# Altium PCB MCU_LORA.PcbDoc
Units mm, origin at the board's own origin, x right, y up, seen from the top; angles counter-clockwise.
Board outline 22 x 22 mm, 2 copper layers (Top Layer, Bottom Layer), stack 0.871 mm thick; 19 components, 30 nets, 124 pads, 75 vias.
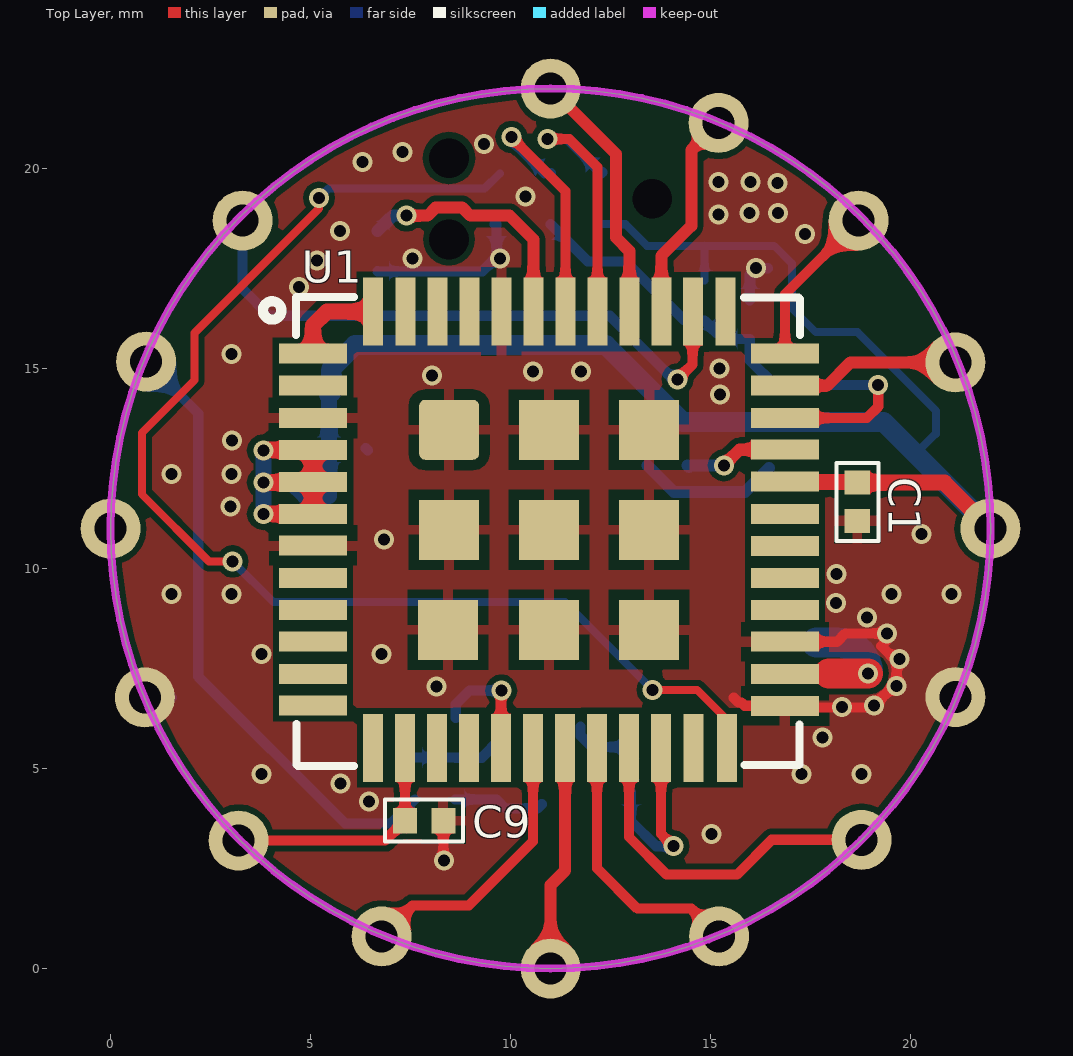
[diagram p0: Top Layer view]
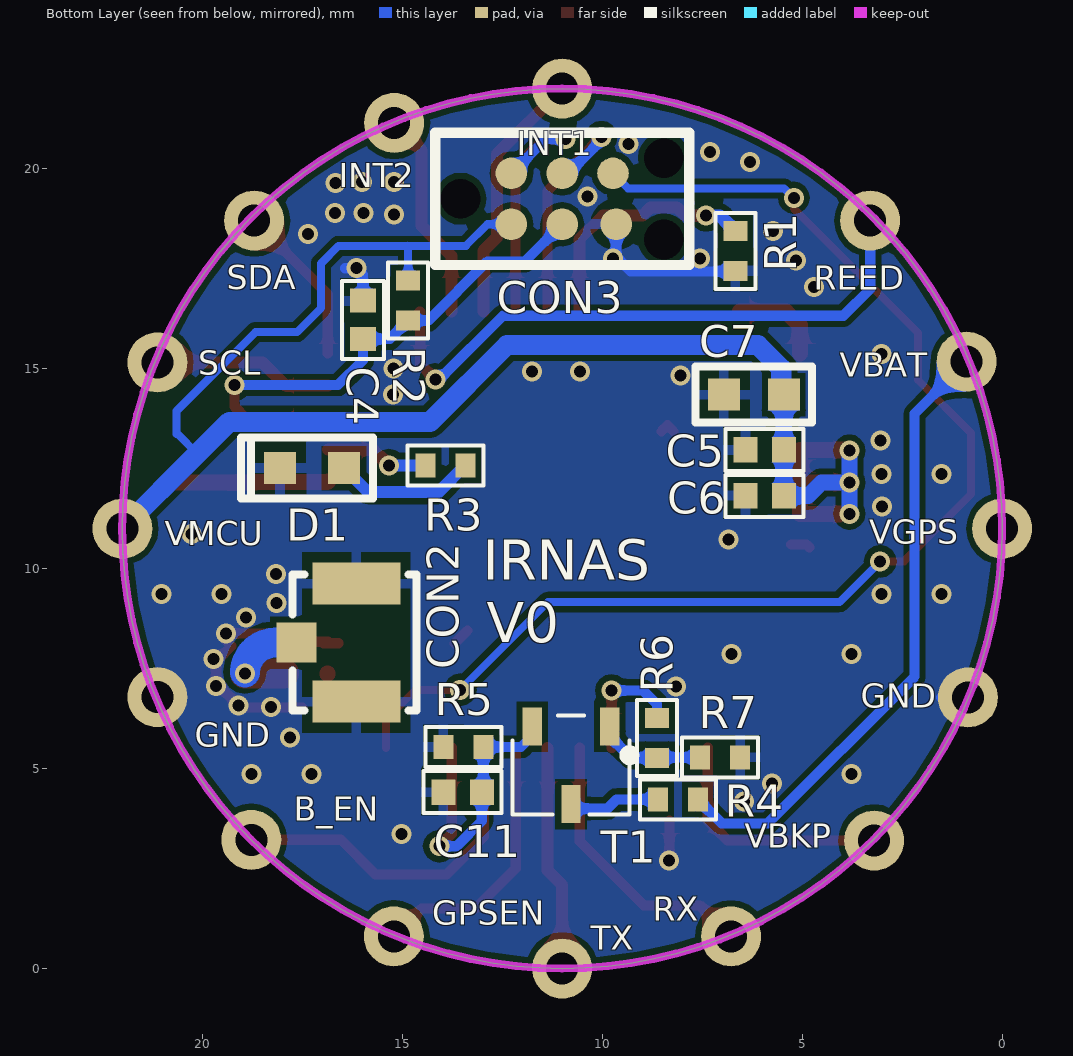
[diagram p1: Bottom Layer view, seen from below]
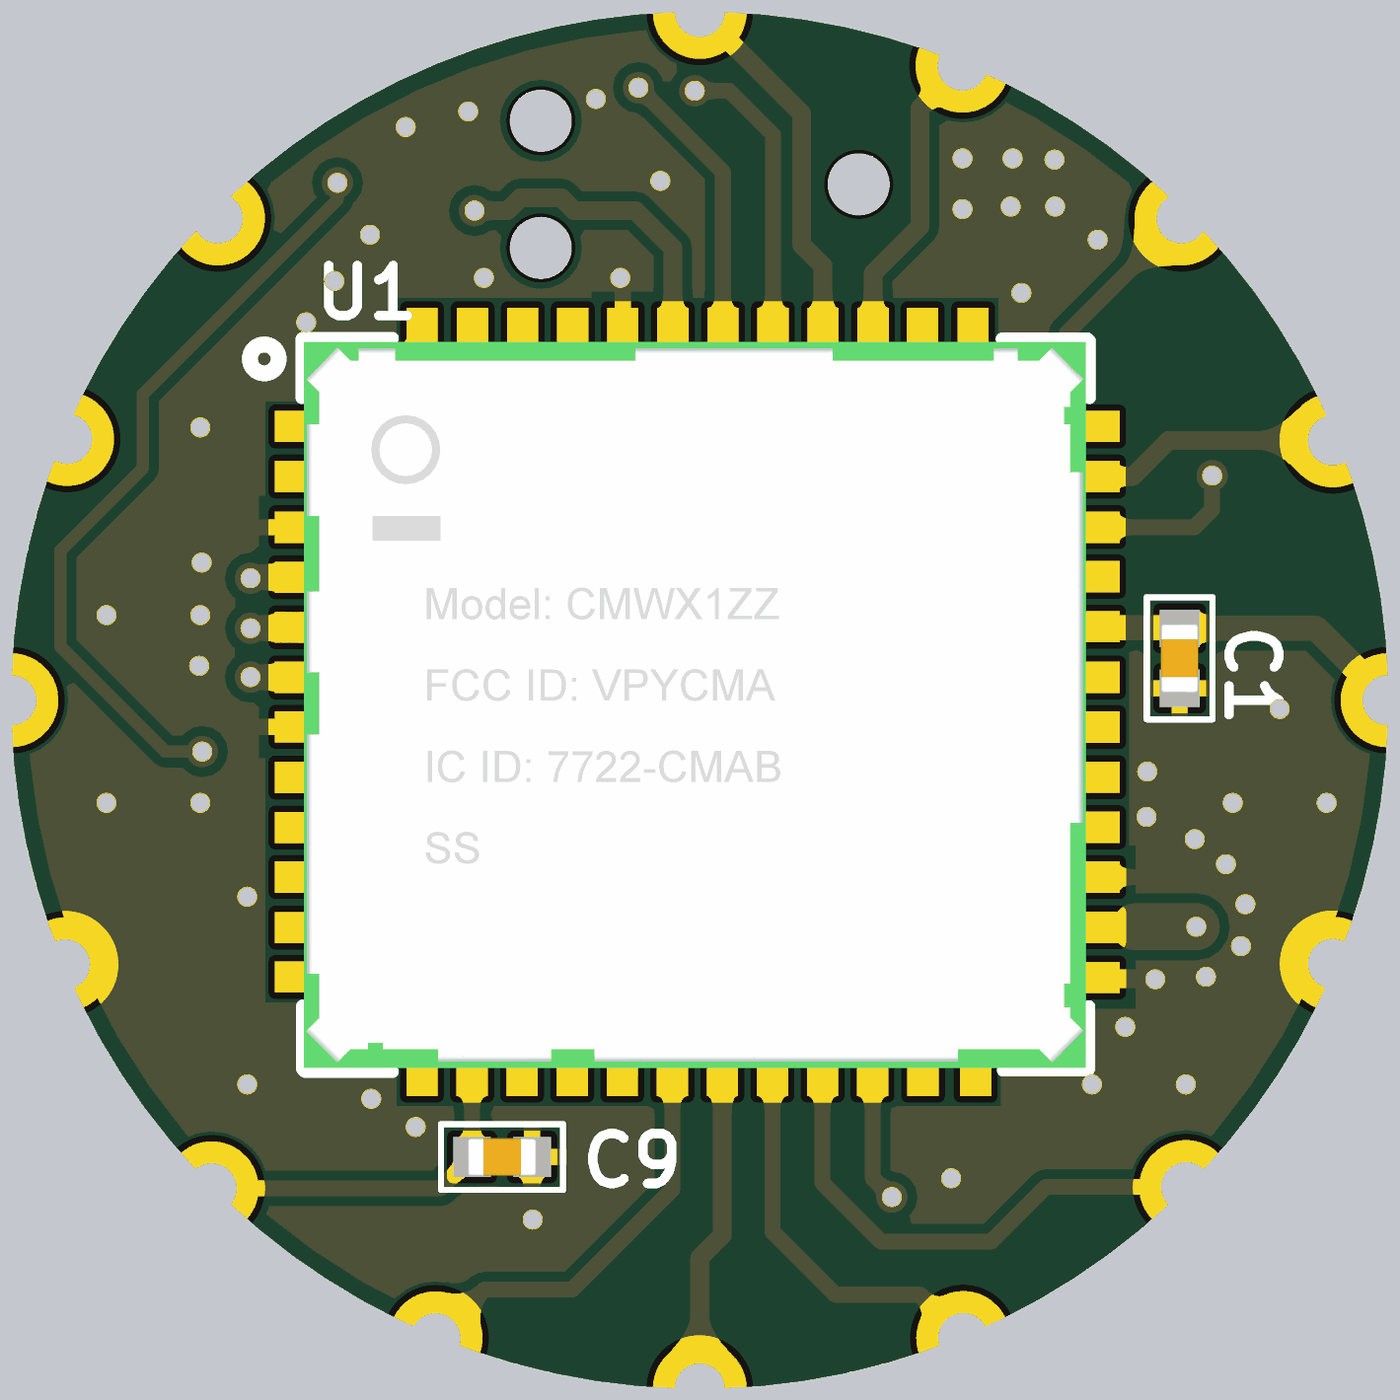
[diagram p2: 3D render of the assembled board from above, using the file's embedded part models]
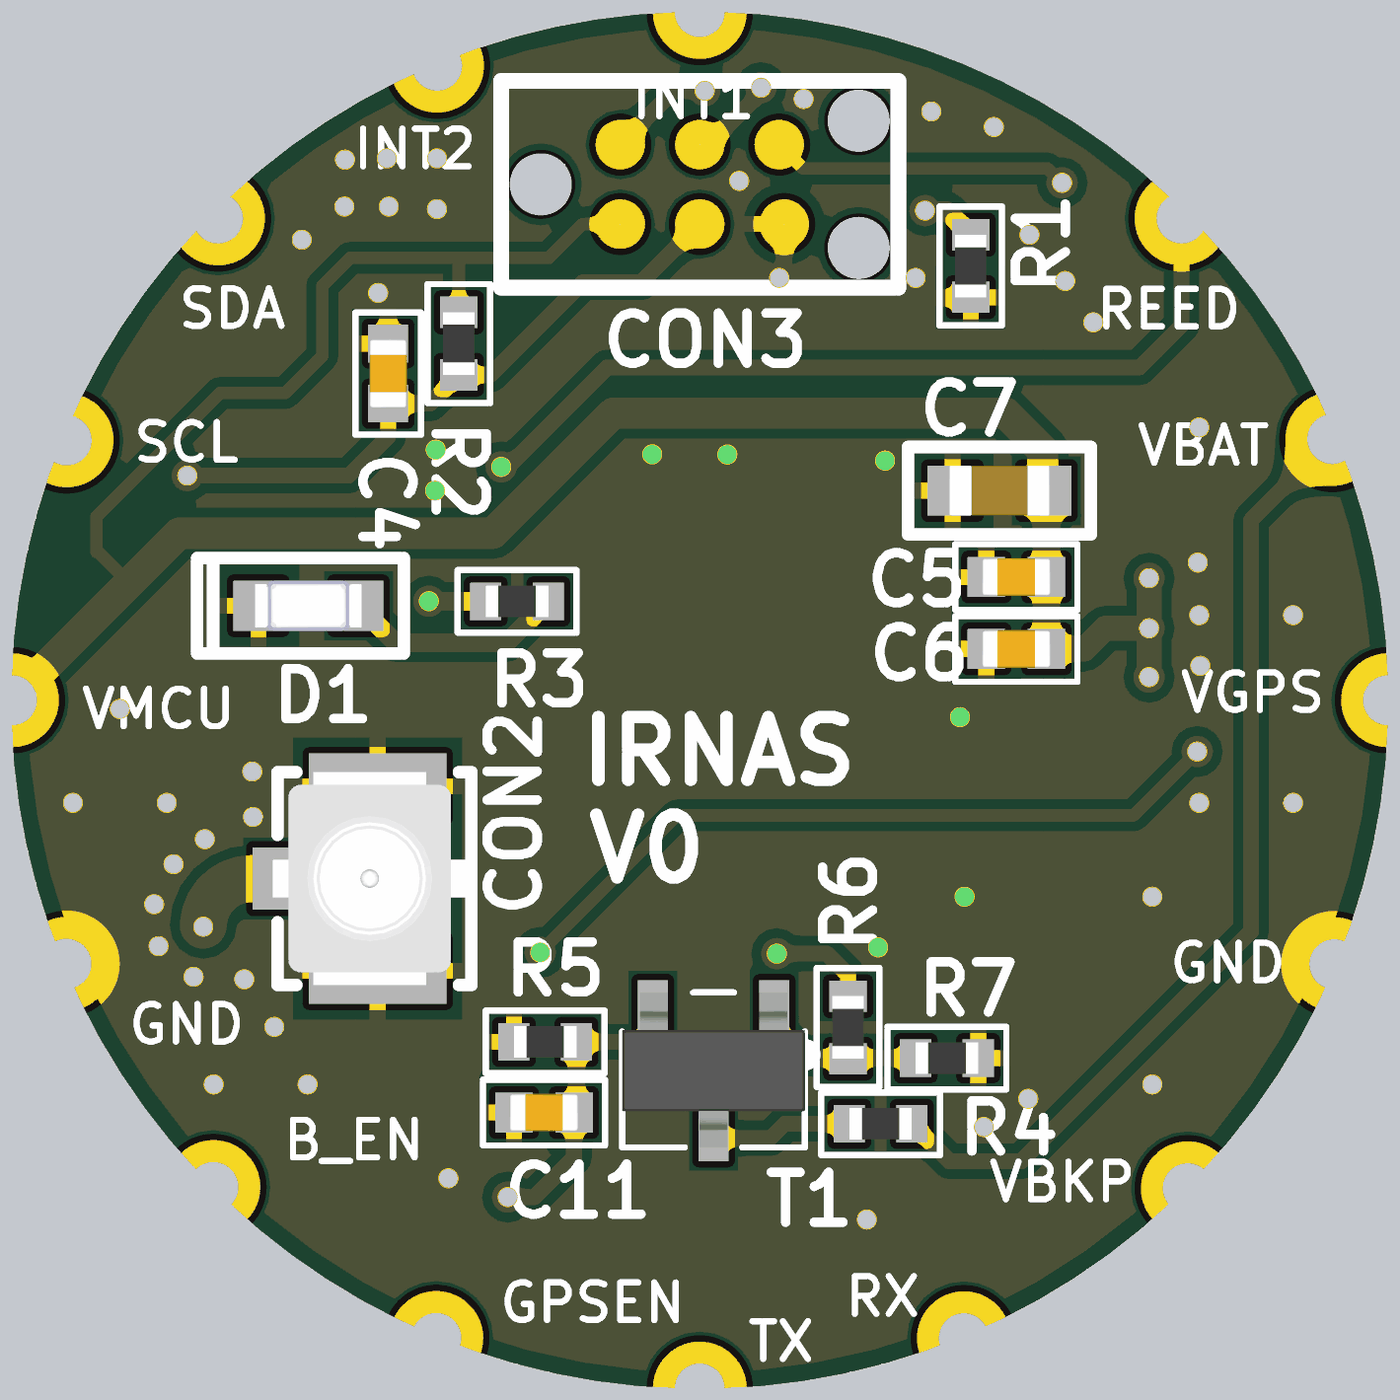
[diagram p3: 3D render of the assembled board from below, using the file's embedded part models]

## Layer stack, top to bottom
Top Solder: solder mask 0.0102, Solder Resist, Dk 3.5
Top Layer: signal copper 0.0356
Dielectric 1: dielectric 0.8, FR-4, Dk 4.8
Bottom Layer: signal copper 0.0356
Bottom Solder: solder mask 0.0102, Solder Resist, Dk 3.5

## Board outline
11,0 cw(c11,11) 0,11 cw(c11,11) 11,22 cw(c11,11) 22,11 cw(c11,11)

## Design rules (kind name [scope] priority, off if disabled: settings)
Clearance Clearance_CON [InComponent('CON1')] p1: gap=-100 ignorepadtopadclearanceinfootprint=TRUE
Clearance [All] p2: gap=0.152 ignorepadtopadclearanceinfootprint=FALSE
ComponentClearance ComponentClearance_CON [InComponent('CON1')] p1: gap=-100 collisioncheckmode=3 verticalgap=-100 showdistances=FALSE
ComponentClearance [All] p2: gap=0.254 collisioncheckmode=3 verticalgap=0.254 showdistances=FALSE
PolygonConnect [All] p1: thpad.connectstyle=Direct thpad.reliefconductorwidth=0.254 thpad.reliefentries=4 thpad.polygonreliefangle="90 Angle" thpad.airgapwidth=0.254 smdpad.connectstyle=Relief smdpad.reliefconductorwidth=0.254 smdpad.reliefentries=4 smdpad.polygonreliefangle="90 Angle" smdpad.airgapwidth=0.254 via.connectstyle=Direct via.reliefconductorwidth=0.254 via.reliefentries=4 via.polygonreliefangle="90 Angle" via.airgapwidth=0.254
RoutingVias [All] p1: holewidth=0.3 width=0.5 viastyle="Through Hole" minholewidth=0.2 minwidth=0.4 maxholewidth=1.5 maxwidth=2
SolderMaskExpansion [All] p1: expansion=0.102
Width [All] p1: maxlimit=5 minlimit=0.15 preferedwidth=0.2
29 further rules are at their usual default settings.

## Classes and differential pairs
component class MAIN_MCU_LORA: C11 CON2 CON3 D1 R3 R4 R5 R6 R7 T1
component class MCU: C1 C4 C5 C6 C7 C9 R1 R2 U1

## Components (designator, comment, footprint, x,y, rotation, side; value= is the part's Value field where it differs from the comment)
C1 "1uF" CAP0402 18.67,11.67 r90 top
C4 "100nF" CAP0402 15.98,16.22 r270 bottom
C5 "1uF" CAP0402 5.94,12.97 r180 bottom
C6 "100nF" CAP0402 5.94,11.82 r180 bottom
C7 "10uF" CAP0603 6.21,14.35 r180 bottom
C9 "10nF" CAP0402 7.84,3.7 r180 top
C11 "10nF" CAP0402 13.49,4.41 r180 bottom
CON2 "U.FL-R-SMT-1(10)" "ufl connector smd" 16.4,8 r90 bottom
CON3 "Tag connect" TC2030-IDC-NL 13.54,19.245 r180 bottom
D1 "LED RED" LED0603 17.255,12.51 r180 bottom
R1 "10K" RES0402 6.67,17.94 r270 bottom
R2 "10k" RES0402 14.85,16.7 r90 bottom
R3 "100R" RES0402 13.92,12.58 r180 bottom
R4 "71k5" RES0402 8.11,4.23 r180 bottom
R5 "100k" RES0402 13.47,5.54 r180 bottom
R6 "100R" RES0402 8.63,5.77 r270 bottom
R7 "100k" RES0402 7.05,5.28 r0 bottom
T1 "2N7002ET1G" SOT23-3AL 10.78,5.08 r270 bottom value=BSS123
U1 "CMWX1ZZABZ" "Lora Module ES0" 11.3,11 r0 top

## Footprints (in the part's own frame and the unit in brackets; to place one, negate y for a bottom-side part, rotate by r counter-clockwise, add the part's x,y. Pads: shape width x height; smd on the part's side, far side on the other; paste and mask are expansions set on the pad)
CAP0402 [mm] "Chip Capacitor, 2-Leads, Body 1.00x0.50mm, IPC Medium Density"
  rect 0.6x0.64 smd: 1(-0.48,0) 2(0.48,0)
  silkscreen extent -0.97,-0.53 0.97,0.53, body extent -0.55,-0.3 0.55,0.3, height 0.45
CAP0603 [mm]
  rect 0.8x0.8 smd: 1(-0.75,0) 2(0.75,0)
  silkscreen extent -1.46,-0.7 1.46,0.7, body extent -0.8,-0.4 0.8,0.4, height 0.9
LED0603 [mm]
  rect 0.8x0.8 smd: 1(-0.8,0) 2(0.8,0)
  silkscreen extent -1.78,-0.76 1.52,0.76, body extent -0.85,-0.4 0.85,0.4, height 0.66
"Lora Module ES0" [mm]
  rect 1.7x0.5 smd paste-5: 1(-6.24,4.375) 2(-6.24,3.575) 3(-6.24,2.765) 4(-6.24,1.965) 5(-6.24,1.165) 6(-6.24,0.365) 7(-6.24,-0.425) 8(-6.24,-1.235) 9(-6.24,-2.035) 10(-6.24,-2.825) 11(-6.24,-3.635) 12(-6.24,-4.425) 25(5.562,-4.43) 26(5.562,-3.629) 27(5.562,-2.827) 28(5.562,-2.03) 29(5.562,-1.23) 30(5.562,-0.43) 31(5.56,0.365) 32(5.56,1.175) 33(5.56,1.975) 34(5.56,2.765) 35(5.56,3.575) 36(5.56,4.375)
  rect 0.5x1.7 smd paste-5: 13(-4.74,-5.48) 14(-3.938,-5.48) 15(-3.138,-5.48) 16(-2.338,-5.48) 17(-1.538,-5.48) 18(-0.738,-5.48) 19(0.062,-5.48) 20(0.862,-5.479) 21(1.662,-5.479) 22(2.462,-5.48) 23(3.269,-5.48) 24(4.11,-5.48) 37(4.07,5.425) 38(3.26,5.425) 39(2.47,5.425) 40(1.67,5.425) 41(0.87,5.425) 42(0.07,5.425) 43(-0.73,5.425) 44(-1.53,5.425) 45(-2.33,5.425) 46(-3.13,5.425) 47(-3.93,5.425) 48(-4.74,5.425)
  rrect20% 1.5x1.5 smd: 49(-2.838,2.47)
  rect 1.5x1.5 smd: 50(-0.338,2.47) 51(2.162,2.47) 52(-2.838,-0.03) 53(-0.338,-0.03) 54(2.162,-0.03) 55(-2.863,-2.53) 56(-0.338,-2.53) 57(2.162,-2.53)
  silkscreen extent -7.49,-5.94 5.93,5.78, body extent -6.63,-5.88 5.87,5.72, height 1.76
RES0402 [mm] "Chip Resistor, 2-Leads, Body 1.00x0.50mm, IPC Medium Density"
  rect 0.5x0.6 smd: 1(-0.5,0) 2(0.5,0)
  silkscreen extent -0.95,-0.5 0.95,0.5, body extent -0.5,-0.25 0.5,0.25, height 0.35
SOT23-3AL [mm]
  rect 0.95x0.48 smd: 1(-0.97,0.97) 2(-0.97,-0.97) 3(0.97,0)
  silkscreen extent -1.25,-1.46 1.23,1.58, body extent -1.25,-1.46 1.23,1.46, height 0.95
TC2030-IDC-NL [mm] "Tag-Connect 6-Pin with No Legs (PN# TC2030-IDC-NL)"
  round 0.9 hole 0.995 unplated: 0(0,0) 0(5.08,-1.016) 0(5.08,1.016)
  round 0.79 smd paste-0.39: 1(1.27,-0.635) 2(1.27,0.635) 3(2.54,-0.635) 4(2.54,0.635) 5(3.89,-0.635) 6(3.81,0.635)
  silkscreen extent -0.64,-1.65 5.71,1.65
"ufl connector smd" [mm]
  rect 1x1 smd: 1(0.15,1.248)
  rect 1.05x2.2 smd: 2(-1.325,-0.252) 2(1.625,-0.252)
  silkscreen extent -1.55,-1.75 1.85,1.35, body extent -1.55,-1.67 1.85,1.43, height 1.25

## Part data
C1 C5: library part "C - 1uF/0402", "CAP CER 1UF 10V 20% X5R 0402", Case/Package=0402, Case Code (Metric)=1005, Dielectric=X5R, IRNAS Part No.=/, Manufacturer=Murata, Manufacturer Part Number=GRM155R61A105ME15D, Max Operating Temperature=85°C, Min Operating Temperature=-55°C, Package Quantity=1, Supplier Part Number 1=2426953, Tolerance=20%, Voltage=10V, Capacitance=1uF, Case Code (Imperial)=0402, ComponentLink1Description=https://datasheet.ciiva.com/164/product-164665.pdf, ComponentLink1URL=https://datasheet.ciiva.com/164/product-164665.pdf, ComponentLink2Description=https://datasheet.ciiva.com/11616/product-11616508.pdf, ComponentLink2URL=https://datasheet.ciiva.com/11616/product-11616508.pdf, ComponentLink3Description=https://datasheet.ciiva.com/46418/1769893-46418047.pdf, ComponentLink3URL=https://datasheet.ciiva.com/46418/1769893-46418047.pdf, ComponentLink4Description=https://datasheet.ciiva.com/164/partnumbering-e-01-164666.pdf, ComponentLink4URL=https://datasheet.ciiva.com/164/partnumbering-e-01-164666.pdf, ComponentLink5Description=https://datasheet.ciiva.com/164/partnumbering-e-01-164667.pdf, ComponentLink5URL=https://datasheet.ciiva.com/164/partnumbering-e-01-164667.pdf, Depth=0.5mm, Height=0.5mm, Lead Free="Lead Free", Length=1mm, Mount="Surface Mount", Packaging="Tape and Reel", Pricing 1="10=0.0379, 100=0.0266, 500=0.0156, 2500=0.0098, 5000=0.0083 (EUR)", Radiation Hardening=No, REACH SVHC="No SVHC", Stock 1=0, Supplier 1=Farnell, Thickness=0.022inch, Voltage Rating=10V, Voltage Rating (DC)=10V, Width=0.02inch
C4 C6: library part "C - 100nF/0402", "MULTICOMP         MC0402X104J160CT             SMD Multilayer Ceramic Capacitor, 0402 [1005 Metric], 0.1 F, 16 V,  5%, X5R, MC Series                          New", Case Code (Imperial)=0402, Case Code (Metric)=1005, Dielectric=X5R, IRNAS Part No.=/, Manufacturer=Multicomp, Manufacturer Part Number=MC0402X104J160CT, Max Operating Temperature=85°C, Min Operating Temperature=-55°C, Supplier Part Number 1=2627419, Tolerance=5%, Voltage Rating=16V, Capacitance=100nF, ComponentLink1Description=http://www.farnell.com/datasheets/2117933.pdf, ComponentLink1URL=http://www.farnell.com/datasheets/2117933.pdf, ComponentLink2Description=http://www.farnell.com/datasheets/2117900.pdf, ComponentLink2URL=http://www.farnell.com/datasheets/2117900.pdf, Packaging="Tape and Reel", Pricing 1="10=0.0139, 100=0.0108, 500=0.0076, 2500=0.0051, 5000=0.0038 (EUR)", REACH SVHC="No SVHC", Stock 1=3230, Supplier 1=Farnell, Voltage Rating (DC)=16V
C7: "10uf/0603/20%", Manufacturer=KEMET, Manufacturer Part Number=C0603C106M8PACTU, Supplier Part Number 1=2820985, Pricing 1="10=0.555, 100=0.315, 500=0.238, 1000=0.2, 2000=0.174, 4000=0.143, 20000=0.123 (GBP)", Stock 1=0, Supplier 1=Farnell
C9 C11: library part "C - 10nF/0402", "CAP CER 10000PF 16V X7R 0402", Case/Package=0402, Case Code (Metric)=1005, Dielectric=X7R, IRNAS Part No.=/, Manufacturer=Murata, Manufacturer Part Number=GRM155R71C103KA01D, Max Operating Temperature=125°C, Min Operating Temperature=-55°C, Package Quantity=1, Supplier Part Number 1=1828864, Tolerance=10%, Voltage=16V, Capacitance=10nF, Case Code (Imperial)=0402, ComponentLink1Description=https://datasheet.ciiva.com/129/partnumbering-e-01-129774.pdf, ComponentLink1URL=https://datasheet.ciiva.com/129/partnumbering-e-01-129774.pdf, ComponentLink2Description=https://datasheet.ciiva.com/129/partnumbering-e-01-129775.pdf, ComponentLink2URL=https://datasheet.ciiva.com/129/partnumbering-e-01-129775.pdf, ComponentLink3Description=https://datasheet.ciiva.com/129/product-129776.pdf, ComponentLink3URL=https://datasheet.ciiva.com/129/product-129776.pdf, ComponentLink4Description=https://datasheet.ciiva.com/18184/getdatasheetpartid-178863-18184649.pdf, ComponentLink4URL=https://datasheet.ciiva.com/18184/getdatasheetpartid-178863-18184649.pdf, ComponentLink5Description=https://datasheet.ciiva.com/22698/608985-22698415.pdf, ComponentLink5URL=https://datasheet.ciiva.com/22698/608985-22698415.pdf, ComponentLink6Description=https://datasheet.ciiva.com/7937/608985-7937614.pdf, ComponentLink6URL=https://datasheet.ciiva.com/7937/608985-7937614.pdf, Depth=0.5mm, Height=0.5mm, Lead Free="Lead Free", Length=1mm, Mount="Surface Mount", Number of Pins=2, Packaging="Tape and Reel", Pricing 1="10=0.0216, 100=0.0151, 500=0.0104, 2500=0.0069, 5000=0.0056 (EUR)", Radiation Hardening=No, REACH SVHC="No SVHC", Stock 1=16478, Supplier 1=Farnell, Termination=SMD/SMT, Thickness=0.022inch, Voltage Rating=16V, Voltage Rating (DC)=16V, Width=0.02inch
CON2: "RF / Coaxial Connector, U.FL Coaxial, Straight Jack, Surface Mount Vertical, 50 ohm, Brass", Dielectric Material="Liquid Crystal Polymer (LCP)", Frequency - Max=6GHz, Housing Color=Beige, Manufacturer=Hirose, Operating Temperature="-40°C ~ 90°C", Standard Package=2,500, Supplier Part Number 1=1688077, Voltage Rating=-, Body Finish=Silver, Body Material="Phosphor Bronze", Cable Group=-, Category="Connectors, Interconnects", Center Contact Material=Brass, Center Contact Plating=Gold, ComponentLink1Description=http://www.farnell.com/datasheets/91524.pdf, ComponentLink1URL=http://www.farnell.com/datasheets/91524.pdf, ComponentLink2Description=http://uk.rs-online.com/webdocs/1363/0900766b81363563.pdf, ComponentLink2URL=http://uk.rs-online.com/webdocs/1363/0900766b81363563.pdf, ComponentLink3Description=http://www.farnell.com/datasheets/1947917.pdf, ComponentLink3URL=http://www.farnell.com/datasheets/1947917.pdf, Connector Style="U.FL, Ultra Miniature Coaxial", Connector Type="Receptacle, Male Pin", Contact Termination=Solder, Family="Coaxial Connectors (RF)", Fastening Type=Snap-On, Featured Product="U.FL Series Connectors", Features=-, Impedance="50 Ohm", Ingress Protection=-, Manufacturer Part Number=U.FL-R-SMT-1(10), Mounting Type="Surface Mount", Online Catalog="UMCC (Ultra Miniature Coax Connectors), U.FL Series", Other Names="H11891TR  Q5400621  U.FL-R-SMT-1 10  U.FL-R-SMT-1(10)-ND  UFLRSMT110", Packaging="Tape & Reel (TR)", Series=U.FL, Shield Termination=Solder, Stock 1=0, Supplier 1=Farnell
CON3: library part "tag connecot 6 pin"
D1: library part "LED - LED RED", "BROADCOM LIMITED - HSMS-C190 - LED, RED, 10MCD, 626NM", Forward Current If=20, Forward Voltage=2.1, LED Colour=Red, Manufacturer="BROADCOM LIMITED", Manufacturer Part Number=HSMS-C190, Supplier Part Number 1=2497356, Automotive Qualification Standard=-, Bulb Size=-, ComponentLink1Description=http://www.farnell.com/datasheets/313031.pdf, ComponentLink1URL=http://www.farnell.com/datasheets/313031.pdf, ComponentLink2Description=http://www.farnell.com/datasheets/1681524.pdf, ComponentLink2URL=http://www.farnell.com/datasheets/1681524.pdf, ComponentLink3Description=http://www.farnell.com/datasheets/2165483.pdf, ComponentLink3URL=http://www.farnell.com/datasheets/2165483.pdf, LED Mounting=SMD, Lens Shape=Rectangular, Luminous Intensity=10, MSL=-, Packaging="Cut Tape", Pricing 1="1=0.361, 10=0.256, 50=0.235, 100=0.106, 200=0.101 (GBP)", Product Range=-, RoHS=YES, Stock 1=7534, Supplier 1=Farnell, SVHC="No SVHC (17-Dec-2015)<!--FANDB--><div class=\"features-and-benefits-container\"><div class=\"features-and-benefits-description\"><span class=\"features-benefits-value\">The HSMS-C190 is a HER SMD Chip LED with untinted/diffused lens, made of GaP. It is designed in an industry standard package 1.6 x 0.8mm footprint with 0.8mm profile. It is compatible with IR reflow solder processes. The small size and wide viewing angle make this LED prime choices for backlighting applications and front panel illumination especially where space is a premium.</span></div><div class=\"features-and-benefits-list\"><ul class=\"features-and-benefits-list-list\"><li class=\"features-and-benefits-list-item\">Small size</li><li class=\"features-and-benefits-list-item\">Industry standard footprint</li><li class=\"features-and-benefits-list-item\">Compatible with IR solder</li><li class=\"features-and-benefits-list-item\">Diffused optics</li><li class=\"features-and-benefits-list-item\">-40 to 85", Viewing Angle=170°, Wavelength Typ=626
R1 R2: library part "R - 10k/0402", "MULTICOMP         MCWR04X1002FTL             SMD Chip Resistor, Thick Film, 10 kohm, 50 V, 0402 [1005 Metric], 62.5 mW,  1%, MCWR Series", Case/Package=0402, Case Code (Metric)=1005, IRNAS Part No.=I-100014, Manufacturer=Multicomp, Manufacturer Part Number=MCWR04X1002FTL, Power Rating=62.5mW, Resistance=10kR, Supplier Part Number 1=2447096, Temperature Coefficient=100ppm/°C, Tolerance=1%, Voltage Rating=50V, Case Code (Imperial)=0402, ComponentLink1Description=http://www.farnell.com/datasheets/1849611.pdf, ComponentLink1URL=http://www.farnell.com/datasheets/1849611.pdf, Composition="Thick Film", Packaging="Cut Tape", Pricing 1="10=0.0029, 100=0.0017, 500=0.0012, 2500=0.001, 5000=0.0008 (EUR)", REACH SVHC="No SVHC", Stock 1=602609, Supplier 1=Farnell, Voltage Rating (DC)=50V
R3 R6: library part "R - 100R/0402", "MULTICOMP         MCMR04X1000FTL            SMD Chip Resistor, Ceramic, MCMR Series, 100 ohm, 50 V, 0402 [1005 Metric], 62.5 mW,  1%", Case/Package=0402, Case Code (Metric)=1005, IRNAS Part No.=/, Manufacturer=Multicomp, Manufacturer Part Number=MCMR04X1000FTL, Power Rating=62.5mW, Supplier Part Number 1=2072515, Temperature Coefficient=100ppm/°C, Tolerance=1%, Voltage Rating=50V, Case Code (Imperial)=0402, ComponentLink1Description=https://datasheet.ciiva.com/28692/1716705-28692087.pdf, ComponentLink1URL=https://datasheet.ciiva.com/28692/1716705-28692087.pdf, ComponentLink2Description=https://datasheet.ciiva.com/22708/1716705-22708156.pdf, ComponentLink2URL=https://datasheet.ciiva.com/22708/1716705-22708156.pdf, Composition=Ceramic, Packaging="Cut Tape", Pricing 1="10=0.0071, 100=0.0042, 500=0.003, 2500=0.0024, 5000=0.0019 (GBP)", REACH SVHC="No SVHC", Resistance=100R, Stock 1=62365, Supplier 1=Farnell, Voltage Rating (DC)=50V
R4: library part "R - 71k5/0402", "MULTICOMP         MCMR04X7152FTL            Surface Mount Chip Resistor, Ceramic, MCMR Series, 71.5 kohm, 62.5 mW,  1%, 50 V", Case/Package=0402, Case Code (Metric)=1005, IRNAS Part No.=/, Manufacturer=Multicomp, Manufacturer Part Number=MCMR04X7152FTL, Power Rating=62.5mW, Resistance=71.5kR, Supplier Part Number 1=2073227, Temperature Coefficient=100ppm/°C, Tolerance=1%, Voltage Rating=50V, Case Code (Imperial)=0402, ComponentLink1Description=https://datasheet.ciiva.com/28672/1716706-28672249.pdf, ComponentLink1URL=https://datasheet.ciiva.com/28672/1716706-28672249.pdf, Composition=Ceramic, Packaging="Cut Tape", Pricing 1="10=0.0054, 100=0.0048, 500=0.0041, 2500=0.0029, 5000=0.0023, 10000=0.002, 50000=0.0015 (EUR)", REACH SVHC="No SVHC", Stock 1=34671, Supplier 1=Farnell, Voltage Rating (DC)=50V
R5 R7: library part "R - 100k/0402", "MULTICOMP   MCWR04X1003FTL   RES, THICK FILM, 100KOHM, 1%, 0.0625W", Case/Package=0402, Case Code (Metric)=1005, IRNAS Part No.=I-100013, Manufacturer=Multicomp, Manufacturer Part Number=MCWR04X1003FTL, Power Rating=62.5mW, Resistance=100kR, Supplier Part Number 1=2447094, Temperature Coefficient=100ppm/°C, Tolerance=1%, Voltage Rating=50V, Case Code (Imperial)=0402, ComponentLink1Description=https://datasheet.ciiva.com/46386/1849611-46386524.pdf, ComponentLink1URL=https://datasheet.ciiva.com/46386/1849611-46386524.pdf, Composition="Thick Film", Mount="Surface Mount", Packaging="Cut Tape", Pricing 1="10=0.0029, 100=0.0017, 500=0.0012, 2500=0.001, 5000=0.0008 (EUR)", REACH SVHC="No SVHC", Stock 1=161188, Supplier 1=Farnell, Voltage Rating (DC)=50V
T1: library part "T_M - 2N7002ET1G", "MOSFET Transistor, N Channel, 310 mA, 60 V, 0.86 ohm, 10 V, 1 V", Supplier Part Number 1=2317616, Author="Ciril Golob", ComponentLink1Description=Datasheet, ComponentLink1URL=c:\ELRADSVN\Altium_Library\Libraries\Active\Datasheet\BSS123.pdf, ComponentLink2Description="Datasheet www", ComponentLink2URL=http://www.onsemi.com/pub/Collateral/BSS123-D.PDF, Date=11.07.2018, ELRAD Id sifra / ELRAD Id No=597778, FIT=0.44, Komp / Device=SMD, Opis / Description="MOSFET BSS123       /N-Channel", Supplier 1=Farnell, Supplier 2=Mouser, Supplier Part Number 2=863-2N7002ET1G, Velikost / Size=SOT23
U1: library part "MCU - CMWX1ZZABZ", "RF Module, FSK, OOK, LoRa, 4.8Kbps, 915MHz, -135.5dBm, 2.2V to 3.6V, I2C, SPI, UART, USB", Manufacturer=Murata, Manufacturer Part Number=CMWX1ZZABZ-091, Supplier Part Number 1=2802546, ComponentLink1Description=Datasheet, ComponentLink1URL=D:\altium\Altium_Library\Active\Datasheet\CMWX1ZZABZ.pdf, Pricing 1="1=11.7, 5=11.06, 10=9.94, 50=9.54, 100=9.14, 250=8.05 (GBP)", Stock 1=175, Supplier 1=Farnell

## Free pads (board coordinates)
  round 1.5 hole 0.8: 1(11,22) 2(15.199,21.142) 3(18.7,18.7) 4(21.119,15.153) 5(21.993,11) 6(21.122,6.788) 7(18.773,3.22) 8(15.211,0.807) 9(11,0) 10(6.778,0.803) 11(3.2,3.2) 12(0.857,6.78) 13(0,11) 14(0.89,15.176) 15(3.3,18.7)
  round 0.25 hole 0.8 unplated: 16(4.04,1.5) 16(4.967,0.9) 16(5.047,21.097) 16(22.37,7.99) 16(22.64,9.1) 17(6.025,21.607) 18(6.997,22.027)

## Via types
v1: diameter 0.5, hole 0.3, Top Layer to Bottom Layer, tented both sides, 75 vias

## Nets (pads, with @x,y where several pads share a name; then routed paths per layer and width w, separated by ;. In a path a pad name is that pad's centre, name@x,y a point inside that pad or via, vN(x,y) a via of type N, cw(c..) or ccw(c..) an arc to the next point about the centre after c; other vN are vias at no path point)
A_INT1: pad.1 U1.40 | length 6.4
  Top Layer w0.3: pad.1 12.63,20.37 12.63,18.28 12.97,17.94 U1.40
A_INT2: pad.2 U1.39 | length 5.3
  Top Layer w0.3: U1.39 13.77,17.82 14.518,18.568 14.518,20.46 pad.2
BAT_AN: C11.2 R5.2 T1.2 U1.22 | length 7.3
  Top Layer w0.254: U1.22 13.762,3.368 v1(14.07,3.06)
  Bottom Layer w0.254: T1.2 11.75,5.82 12.03,5.54 R5.2 12.97,4.45 C11.2 13.01,3.69 13.64,3.06 v1(14.07,3.06)
BAT_MON_EN: R6.1 U1.17 | length 3.1
  Top Layer w0.254: U1.17 9.762,6.944 v1(9.768,6.95)
  Bottom Layer w0.254: R6.1 8.63,6.61 8.97,6.95 v1(9.768,6.95)
BOOST_EN: pad.7 U1.21 | length 8.8
  Top Layer w0.254: U1.21 12.962,3.288 13.9,2.35 15.66,2.35 16.53,3.22 pad.7
BOOT0: R1.1 U1.43 | length 6.3
  Top Layer w0.3: v1(7.4,18.825) 7.925,18.825 8.129,19.029 8.791,19.029 8.995,18.825 9.975,18.825 10.57,18.23 U1.43
  Bottom Layer w0.3: R1.1 7.055,18.825 v1(7.4,18.825)
GND: C1.1 C4.1 C5.1 C6.1 C7.1 C9.1 C11.1 CON2.2 CON3.5 D1.1 pad.6 pad.12 R1.2 R5.1 R7.1 U1.3 U1.7 U1.25 U1.27 U1.44 U1.49 U1.50 U1.51 U1.52 U1.53 U1.54 U1.55 U1.56 U1.57 | length 16.9
  Top Layer w0.254: U1.7@4.825,10.535 4.89,10.6 U1.7@5.28,10.6 ; U1.49@8.216,13.43 8.368,13.582 U1.49@8.52,13.43 ; C9.1@8.31,3.69 C9.1 8.32,2.71 v1(8.33,2.7) ; U1.57@13.37,8.45 U1.57@13.687,8.133 ; 15.58,6.77 15.701,6.649 15.776,6.649 15.855,6.57 U1.25 ; U1.27@16.59,8.133 U1.27@16.966,8.133 ; U1.27 18.163,8.173 18.37,8.38 v1(19.41,8.38) 19.41,8.206 19.267,8.063 19.59,7.74 v1@19.71,7.74 ; U1.25@17.5,6.53 19.04,6.53 v1(19.09,6.58) 19.58,7.07 v1(19.65,7.07) 19.65,7.68 v1@19.71,7.74 ; v1(19.72,7.74) v1@19.71,7.74 ; pad.6@21.058,6.788 pad.6
  Bottom Layer w0.254: pad.12 pad.12@1.53,6.78 ; C5.1@6.38,13.01 C5.1 C5.1@6.43,12.96 ; R1.2 6.68,17.43 9.29,17.43 v1@9.65,17.79 ; CON3.5@9.6,18.61 CON3.5 v1@9.65,17.79 ; v1(9.73,17.75) 9.69,17.75 v1@9.65,17.79 ; C4.1 15.98,17.35 v1(16.14,17.51) 16.43,17.51
  other v1: 15.018,3.36 6.46,4.18 5.75,4.63 3.768,4.86 3.768,4.86 17.268,4.86 18.768,4.86 17.8,5.78 18.28,6.54 8.15,7.05 3.768,7.86 3.768,7.86 6.768,7.86 18.91,8.78 18.14,9.135 1.518,9.36 1.518,9.36 3.018,9.36 3.018,9.36 19.518,9.36 19.518,9.36 21.018,9.36 18.152,9.86 6.841,10.73 20.268,10.86 3,11.55 1.518,12.36 1.518,12.36 3.018,12.36 3.018,12.36 3.04,13.2 15.23,14.35 8.038,14.83 10.56,14.927 11.76,14.93 15.22,15.004 3.018,15.36 3.018,15.36 4.71,17.04 5.16,17.7 7.55,17.75 17.36,18.36 5.73,18.44 15.2,18.85 15.97,18.89 16.68,18.89 10.37,19.3 16.67,19.64 15.199,19.66 16,19.66 6.3,20.161 7.3,20.41 9.34,20.61
GPS_EN: pad.8 U1.20 | length 6.8
  Top Layer w0.254: U1.20 12.162,2.508 13.17,1.5 14.518,1.5 pad.8
GPS_RX: pad.10 U1.18 | length 7.1
  Top Layer w0.254: pad.10 7.555,1.58 8.96,1.58 10.562,3.182 U1.18
GPS_TX: pad.9 U1.19 | length 5.7
  Top Layer w0.3: pad.9 11,2.09 11.362,2.452 U1.19
LED: R3.1 U1.33 | length 2.7
  Top Layer w0.3: v1(15.33,12.583) 15.722,12.975 U1.33
  Bottom Layer w0.3: R3.1@14.46,12.54 R3.1 14.423,12.583 v1(15.33,12.583)
LORA_ANT: CON2.1 U1.26 | length 2.9
  Top Layer w0.4: U1.26 U1.26@16.871,7.38
  Top Layer w0.75: 17.96,7.38 v1(18.935,7.38)
  Bottom Layer w0.4: v1@18.922,7.418 18.935,7.405 cw(c18.165,7.38) v1(18.935,7.38) 18.935,7.405 v1@18.94,7.4 ; v1@18.94,7.4 18.96,7.38 18.94,7.36 v1@18.94,7.4
  Bottom Layer w0.75: CON2.1 18.165,8.15 cw(c18.165,7.38) v1@18.935,7.405
NetD1_2: D1.2 R3.2 | length 3.6
  Bottom Layer w0.3: R3.2 14.08,11.92 15.865,11.92 D1.2
NetR4_1: R4.1 T1.3 | length 2.3
  Bottom Layer w0.254: R4.1 9.64,4.23 9.87,4 10.67,4 T1.3
NetR6_2: R6.2 R7.2 T1.1 | length 3.4
  Bottom Layer w0.254: R7.2 9.29,5.28 ; R6.2 9.28,5.27 9.29,5.28 ; T1.1 9.81,5.8 9.29,5.28
NetU1_1: U1.1 U1.48 | length 2.3
  Top Layer w0.4: U1.1 5.06,16.08 5.405,16.425 U1.48
PB13: U1.16
PB14: U1.15
REED: pad.15 U1.38 | length 15.4
  Top Layer w0.254: v1(14.173,14.73) 14.55,15.107 14.55,16.415 U1.38
  Bottom Layer w0.254: pad.15 3.3,16.99 3.97,16.32 12.48,16.32 14.07,14.73 v1(14.173,14.73)
RESET: C4.2 CON3.3 R2.1 U1.34 | length 13.2
  Top Layer w0.254: U1.34 18.905,13.765 19.19,14.05 v1(19.19,14.59)
  Bottom Layer w0.254: CON3.3 11.93,17.68 12.87,17.68 14.35,16.2 R2.1 15.31,15.74 C4.2 ; C4.2@15.94,15.7 C4.2 ; v1(19.19,14.59) 16.61,14.59 16.34,14.86 16.33,14.86 15.98,15.21 C4.2
SCL: pad.4 U1.35 | length 4.5
  Top Layer w0.3: U1.35 17.915,14.575 18.493,15.153 pad.4
SDA: pad.3 U1.36 | length 4.1
  Top Layer w0.254: U1.36 16.86,16.86 pad.3
SWCLK: CON3.4 U1.42 | length 6.5
  Top Layer w0.254: v1(10.02,20.79) 11.37,19.44 U1.42
  Bottom Layer w0.254: v1(10.02,20.79) 9.94,20.79 10.85,19.88 CON3.4 CON3.4@11.01,19.89
SWDIO: CON3.2 U1.41 | length 6.9
  Top Layer w0.254: v1(10.92,20.74) 11.47,20.74 12.17,20.04 U1.41
  Bottom Layer w0.254: v1(10.92,20.74) 11.41,20.74 CON3.2 CON3.2@12.3,19.91
UART2_RX: U1.23
UART2_TX: CON3.6 U1.24 | length 31.7
  Top Layer w0.2: v1(3.05,10.18) 2.46,10.18 0.78,11.86 0.78,13.39 2.1,14.71 2.1,15.89 5.21,19 v1(5.21,19.27) ; v1(13.55,6.97) 14.66,6.97 15.41,6.22 U1.24
  Bottom Layer w0.2: v1@3.02,10.15 v1(3.05,10.18) 4.07,9.16 11.36,9.16 v1(13.55,6.97) ; v1(5.21,19.27) 5.22,19.27 5.45,19.5 9.35,19.5 CON3.6
VBAT: pad.14 R4.2 | length 15.6
  Bottom Layer w0.254: pad.14 2.19,13.876 2.19,7.3 5.86,3.63 7.01,3.63 R4.2
VBKP: C9.2 pad.11 U1.14 | length 6.3
  Top Layer w0.254: pad.11@3.23,3.17 pad.11 6.86,3.2 C9.2 ; U1.14 7.36,5.518 C9.2 ; C9.2@7.39,3.73 C9.2
VGPS: pad.13
VMCU: C1.2 C5.2 C6.2 C7.2 CON3.1 pad.5 R2.2 U1.4 U1.5 U1.6 U1.32 | length 49.4
  Top Layer w0.4: v1(3.82,11.37) 3.825,11.365 U1.6 U1.5 ; v1(3.82,12.15) 5.045,12.15 U1.5 ; v1(3.82,12.95) 3.835,12.965 U1.4 U1.5 ; U1.5@5.07,12.175 U1.5 ; U1.32 16.875,12.16 C1.2@18.71,12.16 ; C1.2 20.843,12.15 pad.5
  Bottom Layer w0.2: CON3.1 12.87,18.61 13.41,18.07 14.86,18.07 ; R2.2 14.85,18.06 14.86,18.07 ; 20.121,12.911 20.121,12.871 20.62,13.37 20.64,13.37 20.64,13.94 18.67,15.91 17.63,15.91 17.03,16.51 17.03,17.63 16.59,18.07 14.86,18.07
  Bottom Layer w0.4: v1(3.82,11.37) v1(3.82,12.15) ; v1(3.82,12.95) v1(3.82,12.15) ; C7.2 C5.2 C6.2 4.85,11.82 4.52,12.15 v1(3.82,12.15)
  Bottom Layer w0.5: C7.2 5.52,14.41 5.52,15 6.11,15.59 12.38,15.59 14.3,13.67 19.323,13.67 20.121,12.871 pad.5
pads on no net: CON3.0 U1.2 U1.8 U1.9 U1.10 U1.11 U1.12 U1.13 U1.28 U1.29 U1.30 U1.31 U1.37 U1.45 U1.46 U1.47

## Polygon pours and split planes (outlines as drawn)
GND on Top Layer "Top Layer-No Net" (solid, remove dead copper, pour order 0): 11,22 cw(c11,11.007) 21.993,11.007 21.993,10.993 cw(c11,10.993) 11,0 cw(c11,11) 0,11 cw(c11,11)
GND on Bottom Layer "Bottom Layer-GND" (solid, remove dead copper, pour order 4): 11,22 cw(c11,10.97) 22.03,10.97 cw(c11.06,10.97) 11.06,0 11,0 cw(c11,11) 0,11 cw(c11,11)

## Keep-outs
Keep-Out Layer:
  circle w0.2: c11,11 r11

## Other copper
Bottom Layer:
  pour cut-out: 17.233,7.2 14.799,7.2 14.799,9.1 17.241,9.1 17.255,9.1 17.255,7.2

## Silkscreen, mask and mechanical layers (free items; w line width, h text height)
Bottom Overlay:
  text "INT1" at 12.14,20.33 h0.6
  text "INT2" at 16.59,19.53 h0.6
  text "REED" at 4.71,16.97 h0.6
  text "SDA" at 19.38,16.98 h0.6
  text "SCL" at 20.1,14.84 h0.6
  text "VBAT" at 4.06,14.79 h0.6
  text "VGPS" at 3.32,10.62 h0.6
  text "VMCU" at 20.93,10.58 h0.6
  text "IRNAS" at 12.99,9.72 h1
  text "V0" at 12.88,8.16 h1
  text "GND" at 3.54,6.52 h0.6
  text "GND" at 20.18,5.54 h0.6
  text "B_EN" at 17.71,3.69 h0.6
  text "VBKP" at 6.43,3.02 h0.6
  text "RX" at 8.73,1.19 h0.6
  text "GPSEN" at 14.25,1.09 h0.6
  text "TX" at 10.28,0.47 h0.6
Route Tool Path:
  lines w2: 3.117,1.976 cw(c11.007,11.017) 3.873,20.666 ; 5.706,0.251 ccw(c11.007,11.017) 22.301,6.96 ; 7.99,22.632 cw(c11.007,11.017) 23.007,11.017 cw(c11.007,11.017) 22.97,10.074